# EAGLE board ble_shield (EAGLE 6.5.0)
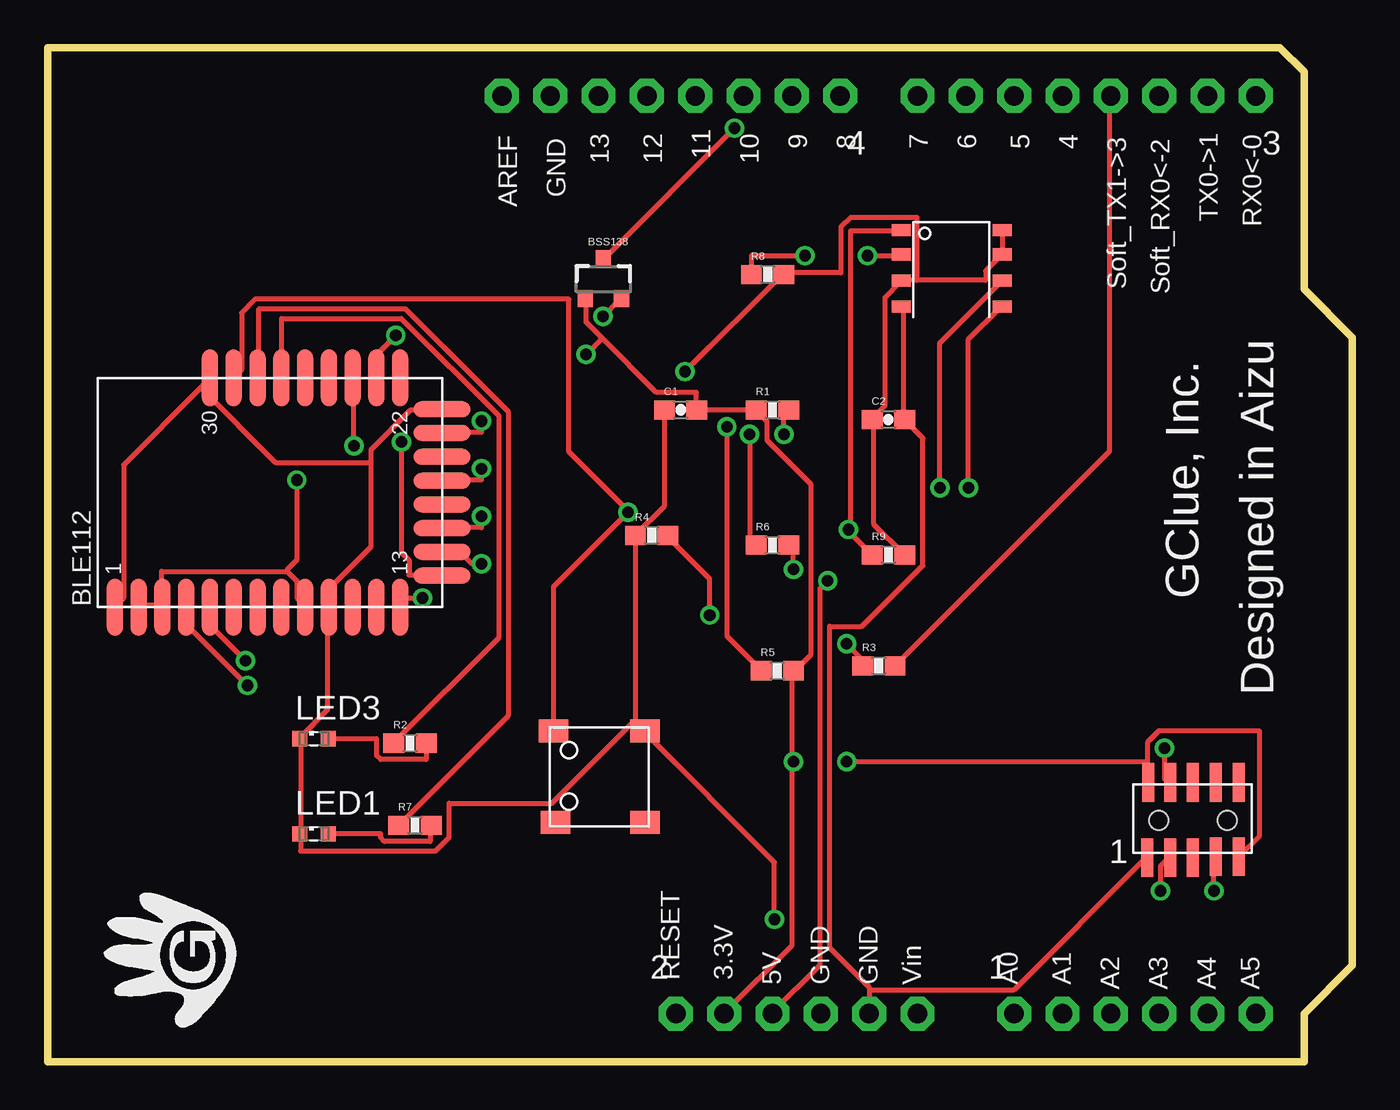
[diagram p0: board, top side]
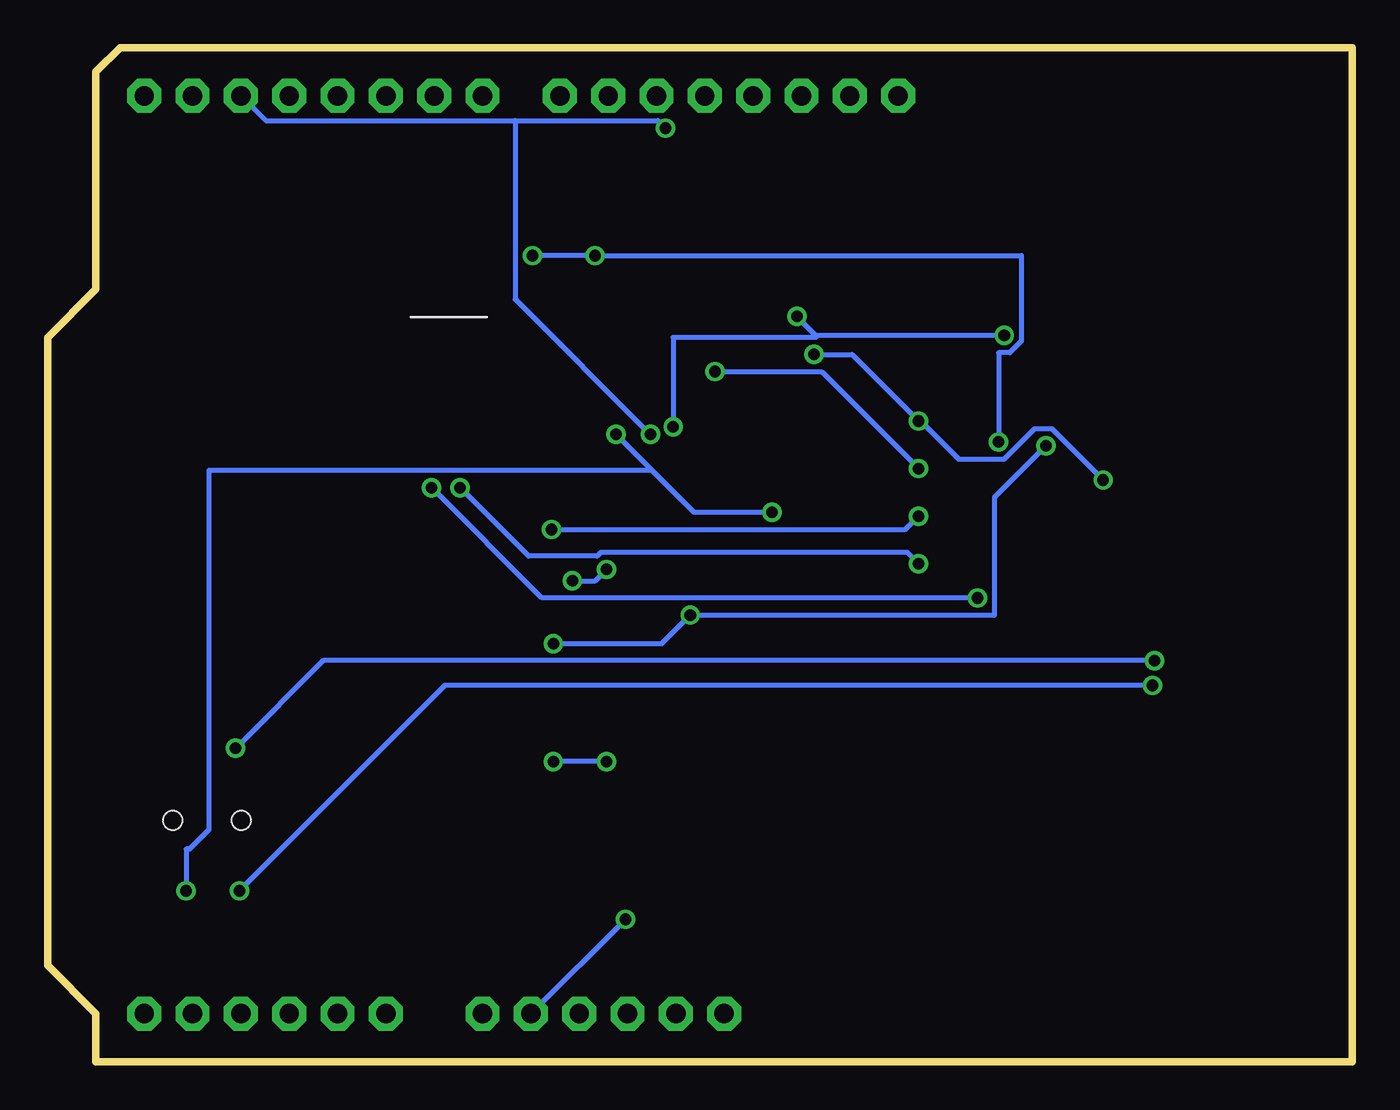
[diagram p1: board, bottom side, seen from below]

Size 68.58 x 53.34 mm. Coordinates in mm from the lower left corner, seen from the top.
Outline: 0,0 66.04,0 66.04,2.54 68.58,5.08 68.58,38.1 66.04,40.64 66.04,52.07 64.77,53.34 0,53.34 0,0
Copper layers (1*16): Top 0.035mm / dielectric 1.5mm / Bottom 0.035mm
Design rules "default": minimum track width 10mil, minimum drill 24mil, track to track 8mil, track to pad 8mil, pad to pad 8mil, via to via 8mil, smd to smd 8mil, copper to edge 40mil, drill to drill 8mil, minimum pad ring 10mil, minimum via ring 8mil, stop-mask expansion 4mil, vias tented up to drill 0mil, thermal gap 10mil

## Footprints (pad centres in the part's own frame; a part is rotated, then mirrored left to right if it is on the bottom)
1X06-CLEANBIG = drill 1.016 pad 1.778 octagon: 1 -6.35,0; 2 -3.81,0; 3 -1.27,0; 4 1.27,0; 5 3.81,0; 6 6.35,0
1X08-CLEANBIG = drill 1.016 pad 1.778 octagon: 1 -8.89,0; 2 -6.35,0; 3 -3.81,0; 4 -1.27,0; 5 1.27,0; 6 3.81,0; 7 6.35,0; 8 8.89,0
SF-BLUEGIGA_BLE112-A = smd 3 x 0.85: AVDD1 -6.05,6.9; AVDD2 -6.05,5.65; GND1 -6.05,8.15; GND2 -6.05,-3.1; GND4 6,3.15; P0_0 6,0.65; P0_1 6,-0.6; P0_2 6,-1.85; P0_3 6,-3.1; P0_4 6,-4.35; P0_5 6,-5.6; P0_6 6,-6.85; P1_5 -6.05,-6.85; P1_6 -6.05,-0.6; P1_7 -6.05,0.65; P2_0 -6.05,1.9; P2_1 -6.05,3.15; P2_2 -6.05,4.4; RESET 6,1.9; USB+ -6.05,-4.35; USB- -6.05,-5.6; VDD_USB -6.05,-1.85 | smd 0.85 x 3: DVDD 3.1,-9.05; GND3 4.35,-9.05; P0_7 1.85,-9.05; P1_0 0.6,-9.05; P1_1 -0.65,-9.05; P1_2 -1.9,-9.05; P1_3 -3.15,-9.05; P1_4 -4.4,-9.05
SOT23-3 = smd 0.8 x 0.9: 1 -0.95,-1; 2 0.95,-1; 3 0,1.1
0603-CAP = smd 1.1 x 1: 1 -0.85,0; 2 0.85,0
LED_SML0603 = smd 0.8 x 0.8: A 0.75,0; C -0.75,0
0603-RES = smd 1.1 x 1: 1 -0.85,0; 2 0.85,0
PIN-HEADER-SMT(1.27MM)2X5 = smd 0.635 x 2.032: 1 -2.4,-1.95; 2 -2.35,2; 3 -1.2,-1.95; 4 -1.2,2; 5 0,-1.95; 6 0,2; 7 1.2,-1.9; 8 1.2,2; 9 2.4,-1.9; 10 2.4,2 | hole 1: 1.8,0; -1.8,0
SWICTH-LS6J2M-T = smd 1.55 x 1.2: 1 -2.4,2.4; 2 -2.3,-2.4; 3 2.4,2.4; 4 2.4,-2.4
FLASH-MEMORY-2M(WINBOND) = smd 1 x 0.635: CLK 2.67,0.2; CS -2.64,2.84; DI 2.67,-1.17; DO -2.64,1.57; GND -2.64,-1.17; HOLD# 2.67,1.57; VCC 2.67,2.84; WP# -2.64,0.2

## Placement (x,y rotation side)
1  [1X06-CLEANBIG]  57.15,2.54 0 top
2  [1X06-CLEANBIG]  39.37,2.54 0 top
3  [1X08-CLEANBIG]  54.61,50.8 180 top
4  [1X08-CLEANBIG]  32.77,50.8 180 top
BLE112  [SF-BLUEGIGA_BLE112-A]  11.68,29.97 90 top
BSS138  [SOT23-3]  29.21,41.15 0 top
C1  0.1μ  [0603-CAP]  33.27,34.29 0 top
C2  1μ  [0603-CAP]  44.2,33.78 0 top
LED1  [LED_SML0603]  14,12 0 top
LED3  [LED_SML0603]  14,17 0 top
R1  4.7K  [0603-RES]  38.1,34.29 0 top
R2  180  [0603-RES]  19.05,16.76 0 top
R3  10K  [0603-RES]  43.69,20.83 0 top
R4  10K  [0603-RES]  31.75,27.69 0 top
R5  10K  [0603-RES]  38.35,20.57 0 top
R6  10K  [0603-RES]  38.1,27.18 0 top
R7  180  [0603-RES]  19.3,12.45 0 top
R8  10K  [0603-RES]  37.85,41.4 0 top
R9  10K  [0603-RES]  44.2,26.67 0 top
U$1  PIN-HEADER-SMT(1.27MM)2X5  [PIN-HEADER-SMT(1.27MM)2X5]  60.2,12.7 0 top
U$4  SWITCH-LS6J2M-T  [SWICTH-LS6J2M-T]  29,15 0 top
U$7  FLASH-MEMORY-2M(WINBOND)  [FLASH-MEMORY-2M(WINBOND)]  47.5,40.89 0 top

## Library data of the parts
1-4 = adafruit
BLE112 = ble112
BSS138 C1 C2 R1-R9 = SparkFun
LED1 LED3 = eagle-ltspice; SPICEMODEL: NONE; SPICEPREFIX: D; SPICETYPE: diode
U$1 U$4 U$7 = gclue

## Nets
3.3V: 2.2 BLE112.AVDD1 BLE112.AVDD2 BLE112.DVDD BLE112.VDD_USB BSS138.1 C1.2 R1.1 R5.2 U$1.2 U$1.9
5V: 2.3 R6.2
DEBUG_CLOCK: BLE112.P2_1 U$1.4
DEBUG_DATA: BLE112.P2_2 U$1.3
GND: 2.5 BLE112.GND1 BLE112.GND2 BLE112.GND3 BLE112.GND4 C1.1 C2.2 LED1.C LED3.C R4.1 U$1.1 U$4.3 U$7.GND
N$1: LED1.A R7.2
N$2: LED3.A R2.2
P0_0: BLE112.P0_0 R7.1
P0_1: BLE112.P0_1 R2.1
P0_2: BLE112.P0_2
P0_3: BLE112.P0_3
P0_6: BLE112.P0_6
P0_7: BLE112.P0_7
P1_0: BLE112.P1_0 C2.1 R8.2 R9.2 U$7.HOLD# U$7.VCC U$7.WP#
P1_1: BLE112.P1_1
P1_2: BLE112.P1_2 R9.1 U$7.CS
P1_3: BLE112.P1_3 U$7.CLK
P1_4: BLE112.P1_4 R8.1 U$7.DO
P1_5: BLE112.P1_5 U$7.DI
P1_6: BLE112.P1_6
P1_7: BLE112.P1_7
P2_0: BLE112.P2_0
RESET: BLE112.RESET R1.2 U$1.7 U$4.1
RX_HV: 3.4 R3.2
RX_LV: BLE112.P0_4 R3.1 R4.2
TX_HV: 3.3 BSS138.3 R6.1
TX_LV: BLE112.P0_5 BSS138.2 R5.1
USB+: BLE112.USB+
USB-: BLE112.USB-

## Tracks (layer width: path | path; a pad name or v marks a point on that pad's centre or on a via)
3.3V  (via drill 0.61)
  Top 0.254: BLE112.AVDD1 4.8,24 6,24 BLE112.AVDD2 6,24.1 6,25.8 12.6,25.8 | 12.6,25.8 13.1,25.3 13.1,24.4 13.5,24 BLE112.VDD_USB | 57.8,15.8 57.8,16.8 58.4,17.4 63.7,17.4 63.7,11.9 U$1.9 | 57.8,15.8 57.8,14.7 U$1.2 | 29.15,38.05 32,35.2 34.1,35.2 34.1,34.3 C1.2 34.2,34.3 37.2,34.3 R1.1 37.3,34.2 37.8,33.7 37.8,32.7 40.1,30.4 40.1,21.4 39.3,20.6 R5.2 39.1,20.5 39.1,15.8 | 29.15,38.05 28.3,38.9 28.3,40.1 BSS138.1 | v22.8,33.7 22.8,33.1 20.8,33.1 BLE112.DVDD | 29.15,38.05 v28.3,37.2 | 39.1,15.8 39.1,6.1 35.6,2.6 2.2 | v42,15.8 57.8,15.8 | v39.2,15.8 39.1,15.8 | v13.1,30.6 13.1,26.4 12.6,25.9 12.6,25.8
  Bottom 0.254: v28.3,37.2 26.3,37.2 v22.8,33.7 22.7,33.7 20.7,31.7 18.3,31.7 16.7,33.3 15.8,33.3 v13.1,30.6 | v39.2,15.8 v42,15.8
5V  (via drill 0.61)
  Top 0.254: v39.2,25.9 39.2,26.9 39,27.1 R6.2 | v41,25.3 40.6,24.9 40.6,5.1 38.1,2.6 2.3
  Bottom 0.254: v39.2,25.9 39.8,25.3 v41,25.3
DEBUG_CLOCK  (via drill 0.61)
  Top 0.254: v58.7,16.5 58.7,14.9 58.9,14.7 U$1.4 | v10.4,21.1 8.6,22.9 8.6,23.9 BLE112.P2_1
  Bottom 0.254: v58.7,16.5 54.1,21.1 v10.4,21.1
DEBUG_DATA  (via drill 0.61)
  Top 0.254: v58.5,9 58.5,10.3 58.9,10.7 U$1.3 | v10.5,19.8 7.3,23 7.3,23.9 BLE112.P2_2
  Bottom 0.254: v58.5,9 47.7,19.8 v10.5,19.8
GND  (via drill 0.61)
  Top 0.254: 8.05,35.45 8.5,35.9 BLE112.GND4 | 8.05,35.45 4,31.4 4,24.4 3.6,24 BLE112.GND1 | C1.1 32.4,34.2 32.4,29.2 R4.1 30.9,17.9 U$4.3 | 17,31.5 17,27.1 14.8,24.9 14.8,24 BLE112.GND2 14.7,23.9 14.7,18.5 13.3,17.1 LED3.C 13.3,17 13.3,12 LED1.C 13.3,11.9 13.3,11.1 20.4,11.1 21.1,11.8 21.1,13.6 26.5,13.6 30.8,17.9 U$4.3 | 17,31.5 17,32.2 19.1,34.3 20.7,34.3 BLE112.GND3 | 8.05,35.45 12,31.5 17,31.5 | U$7.GND 44.9,39.7 45,39.6 45,33.8 C2.2 45.1,33.7 46,32.8 46,26.1 42.8,22.9 41.1,22.9 41.1,6 43.2,3.9 43.2,3.8 | 43.2,3.8 50.8,3.8 57.7,10.7 U$1.1 | 43.2,3.8 43.2,2.6 2.5 | v38.2,7.5 38.2,10.5 31.4,17.3 U$4.3
  Bottom 0.254: v38.2,7.5 43.1,2.6 2.5
N$1
  Top 0.254: LED1.A 17.5,12 17.5,11.8 17.7,11.6 20.1,11.6 20.1,12.4 R7.2
N$2
  Top 0.254: LED3.A 17.3,17 17.3,16.1 17.5,15.9 19.9,15.9 R2.2
P0_0
  Top 0.254: R7.1 18.5,12.5 24.2,18.2 24.2,34.2 18.8,39.6 11.1,39.6 11.1,36 BLE112.P0_0
P0_1
  Top 0.254: R2.1 18.2,16.8 23.7,22.3 23.7,34 18.6,39.1 12.3,39.1 12.3,36 BLE112.P0_1
P1_0  (via drill 0.61)
  Top 0.254: R9.2 45,26.7 43.4,28.3 43.4,33.7 C2.1 43.4,33.9 44,34.5 44,40.2 44.8,41 U$7.WP# 44.9,41.1 45.7,41.1 | 45.7,41.1 49.3,41.1 49.3,41.6 50.1,42.4 U$7.HOLD# 50.2,42.5 50.2,43.7 U$7.VCC | 45.7,41.1 45.7,44.4 42.2,44.4 41.7,43.9 41.7,41.5 38.7,41.5 R8.2 38.6,41.4 v33.5,36.3 | v22.8,31.2 22.8,30.6 20.8,30.6 BLE112.P1_0
  Bottom 0.254: v22.8,31.2 27.9,36.3 v33.5,36.3
P1_2  (via drill 0.61)
  Top 0.254: 42.2,28 42.2,27.8 43.3,26.7 R9.1 | 42.2,28 42.2,43.7 44.8,43.7 U$7.CS | v22.8,28.7 22.8,28.1 20.8,28.1 BLE112.P1_2 | v42.1,28 42.2,28
  Bottom 0.254: v22.8,28.7 23.5,28 v42.1,28
P1_3  (via drill 0.61)
  Top 0.254: v46.9,30.2 46.9,37.8 50.1,41 U$7.CLK | v22.8,26.2 22.3,26.2 21.7,26.8 20.8,26.8 BLE112.P1_3
  Bottom 0.254: v46.9,30.2 43.3,26.6 39.7,26.6 39.5,26.8 23.4,26.8 v22.8,26.2
P1_4  (via drill 0.61)
  Top 0.254: v43.1,42.4 44.8,42.4 U$7.DO | v39.8,42.4 37,42.4 37,41.5 R8.1 | v18.6,32.6 18.6,26.8 19,26.4 19,25.6 20.7,25.6 BLE112.P1_4
  Bottom 0.254: v43.1,42.4 v39.8,42.4 17.4,42.4 17.4,37.9 18,37.3 18.6,37.3 v18.6,32.6
P1_5  (via drill 0.61)
  Top 0.254: v48.4,30.2 48.4,38 50.1,39.7 U$7.DI | v19.7,24.4 18.6,24.4 18.6,24 BLE112.P1_5
  Bottom 0.254: v48.4,30.2 42.6,24.4 v19.7,24.4
RESET  (via drill 0.61)
  Top 0.254: v38.7,33 38.7,34 38.9,34.2 R1.2 | U$4.1 26.6,25 v30.5,28.9 30.5,29 27.4,32.1 27.4,40.1 10.9,40.1 10.2,39.4 10.2,36.4 9.8,36 BLE112.RESET | v61.3,9 61.3,10.8 U$1.7
  Bottom 0.254: 36.85,31.15 34.6,28.9 v30.5,28.9 | 36.85,31.15 v38.7,33 | v61.3,9 61.3,11.2 61.1,11.2 60.1,12.2 60.1,31.1 36.9,31.1 36.85,31.15
RX_HV
  Top 0.254: R3.2 44.6,20.9 55.8,32.1 55.8,50.8 3.4
RX_LV  (via drill 0.61)
  Top 0.254: v34.8,23.5 34.8,25.4 32.6,27.6 R4.2 | v42,22 42.8,21.2 42.8,20.9 R3.1 | v16.1,32.4 16.1,35.9 BLE112.P0_4
  Bottom 0.254: v42,22 36.3,22 v34.8,23.5 18.8,23.5 18.8,29.7 v16.1,32.4
TX_HV  (via drill 0.61)
  Top 0.254: v36.1,49.1 29.3,42.3 BSS138.3 | v36.9,33 36.9,27.5 37.2,27.2 R6.1
  Bottom 0.254: v36.1,49.1 36.5,49.5 44,49.5 | 44,49.5 57.1,49.5 58.4,50.8 3.3 | v36.9,33 44,40.1 44,49.5
TX_LV  (via drill 0.61)
  Top 0.254: v29.2,39.2 30.1,40.1 BSS138.2 | v18.3,38.2 17.3,37.2 17.3,36 BLE112.P0_5 | v35.7,33.4 35.7,22.4 37.5,20.6 R5.1
  Bottom 0.254: 28.2,38.2 v29.2,39.2 | v18.3,38.2 28.2,38.2 | v35.7,33.4 35.7,38.1 28.2,38.1 28.2,38.2

## Text on the board
tPlace: 9 | 8 | 7 | 6 | 5 | 4 | 13 | 12 | 11 | 10 | AREF | GND | TX0->1 | RX0<-0 | Soft_TX1->3 | Soft_RX0<-2 | GClue, Inc. | Designed in Aizu | RESET | 3.3V | 5V | GND | GND | Vin | A0 | A1 | A2 | A3 | A4 | A5